# Altium PCB 990310_PCB.PcbDoc
Units mm, origin at the board's own origin, x right, y up, seen from the top; angles counter-clockwise.
Board outline 64.39 x 76.58 mm, 2 copper layers (Top Layer, Bottom Layer); 34 components, 39 nets, 141 pads, 0 vias.
Unrouted connection lines stored in the file: 84.
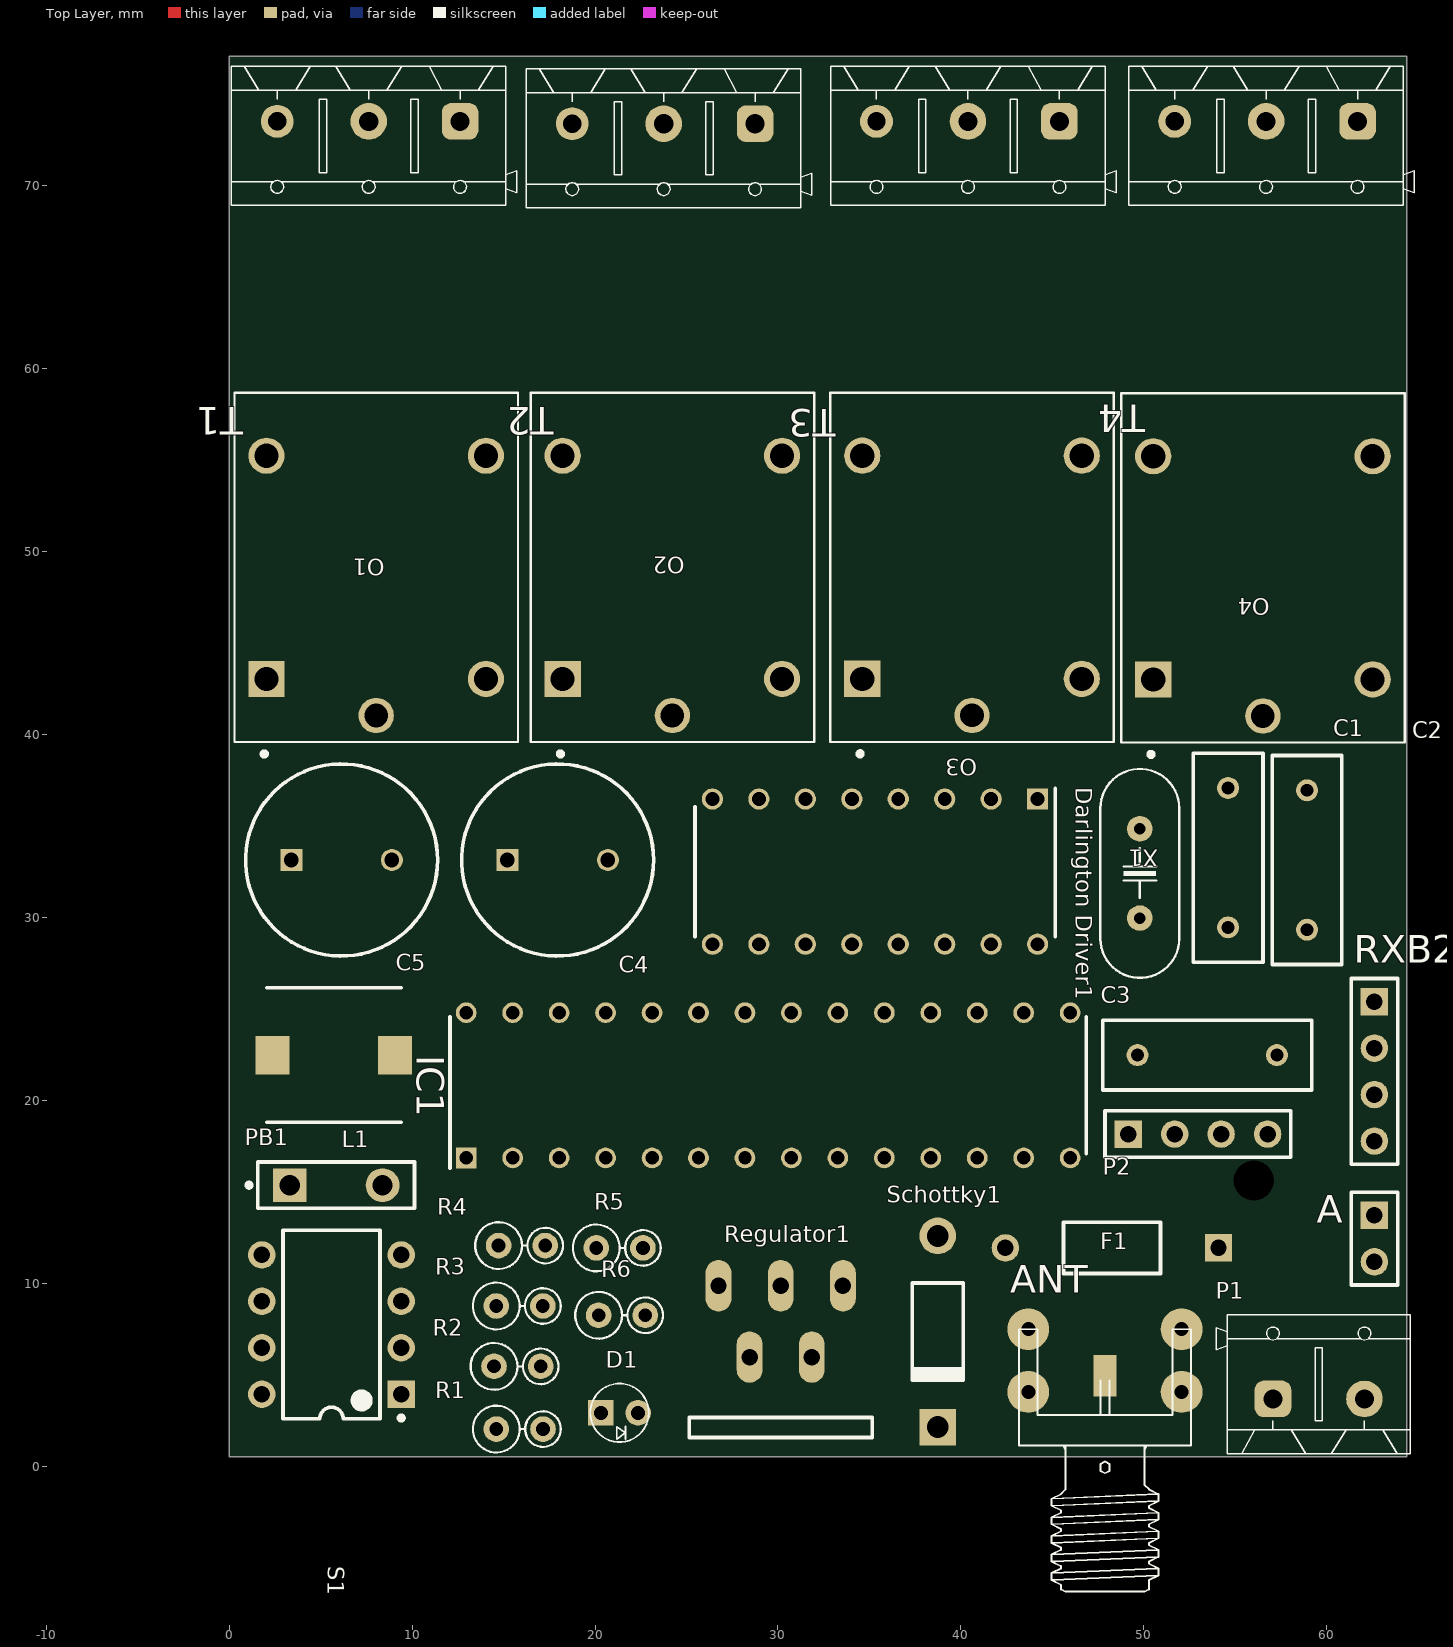
[diagram p0: Top Layer view]
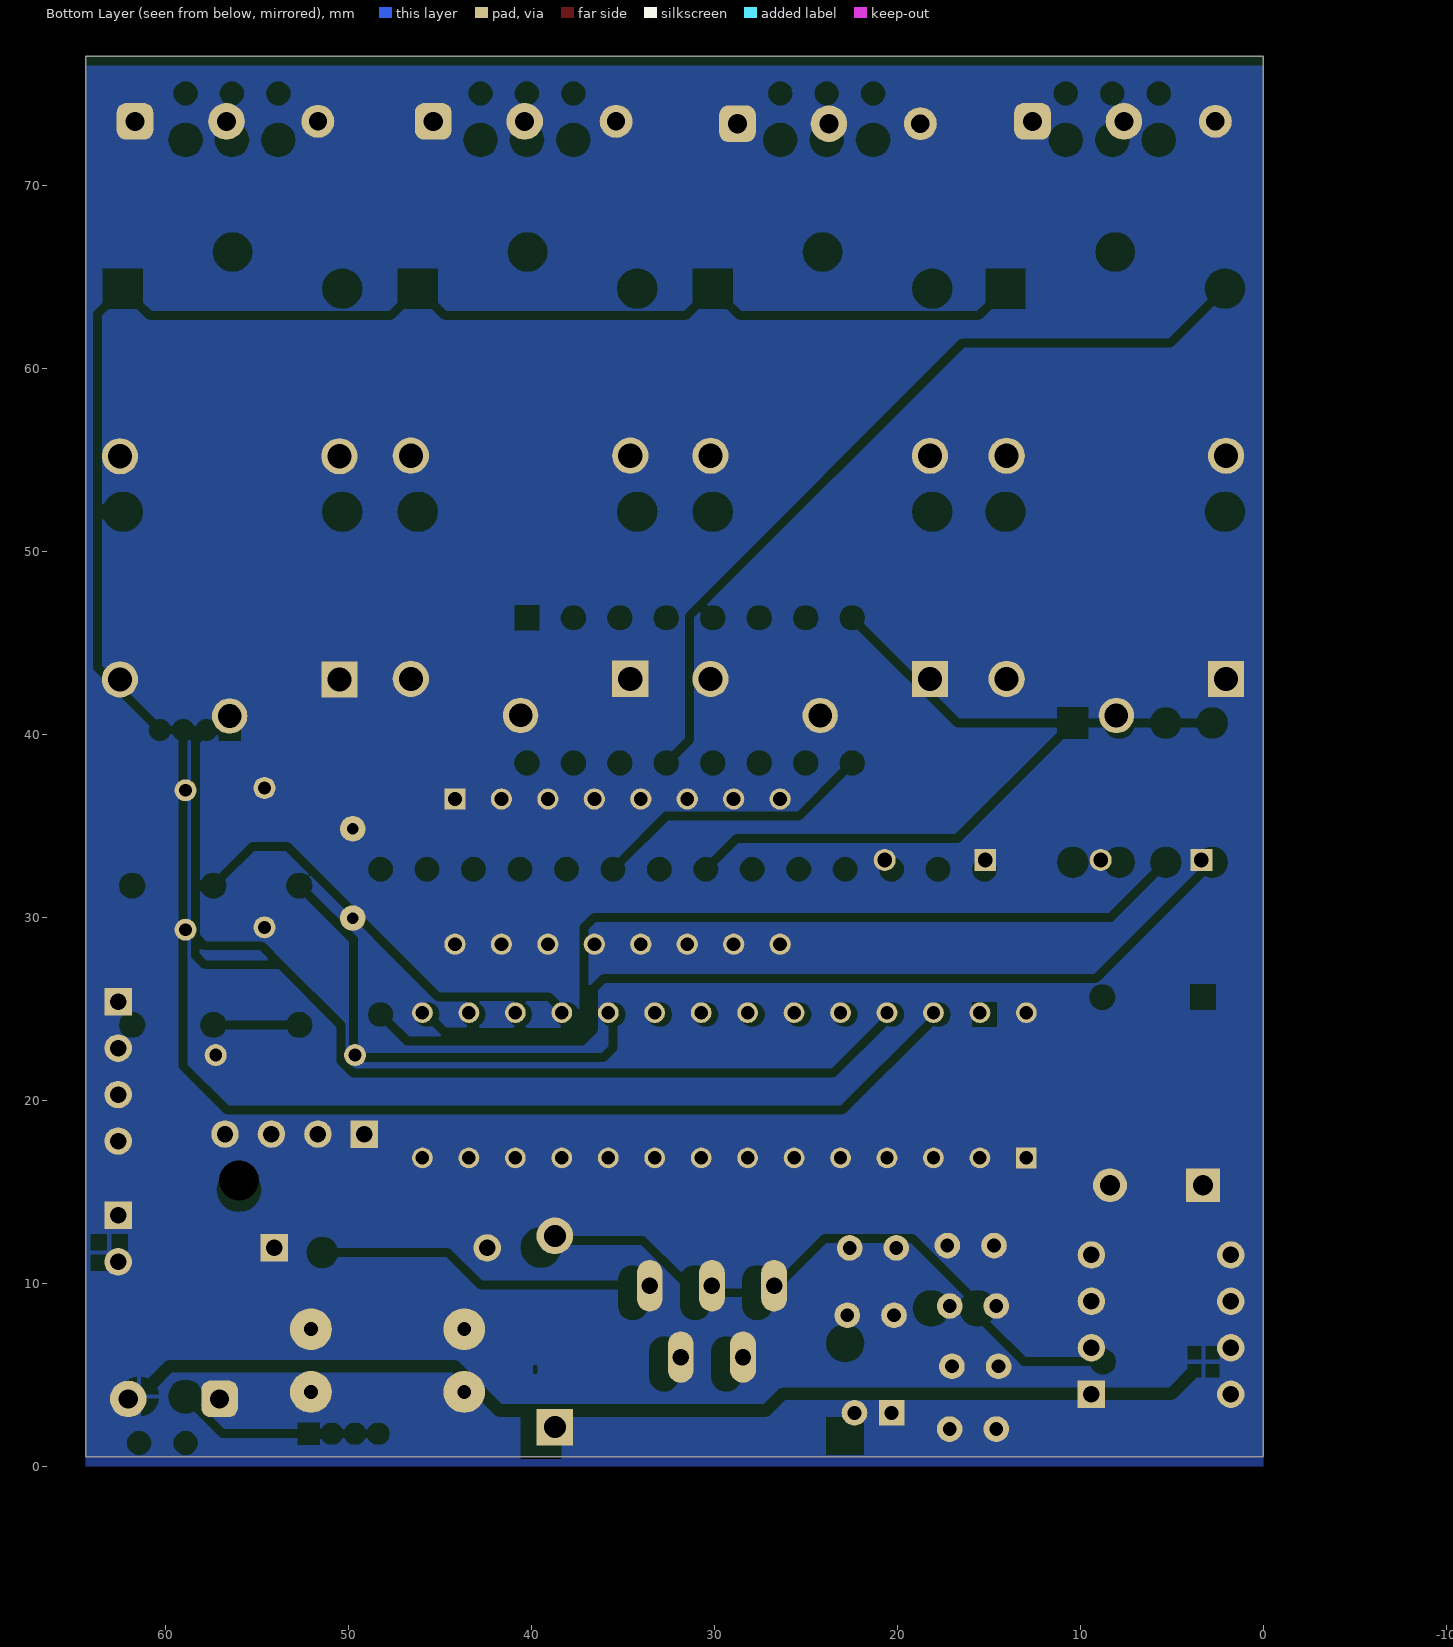
[diagram p1: Bottom Layer view, seen from below]

## Layer stack, top to bottom
Top Solder: solder mask 0.0102, Solder Resist, Dk 3.5
Top Layer: signal copper 0.0356
Dielectric 1: dielectric 0.32, FR-4, Dk 4.8
Bottom Layer: signal copper 0.0356
Bottom Solder: solder mask 0.0102, Solder Resist, Dk 3.5

## Board outline
0,0.508 64.389,0.508 64.389,77.089 0,77.089

## Design rules (kind name [scope] priority, off if disabled: settings)
Clearance [All] p1: gap=0.1 ignorepadtopadclearanceinfootprint=FALSE
PolygonConnect [All] p1: connectstyle=Relief reliefconductorwidth=0.254 reliefentries=4 polygonreliefangle="90 Angle" airgapwidth=0.254
RoomDefinition 990308_Schematic [InComponentClass('990308_Schematic')] p1: confinementstyle=ConfineIn formatcopy=TRUE lockcomponents=FALSE outline -25.4,-24.892 25.4,-24.892 25.4,0.508 -25.4,0.508
RoutingVias [All] p1: holewidth=0.711 width=1.27 viastyle="Through Hole" minholewidth=0.711 minwidth=1.27 maxholewidth=0.711 maxwidth=1.27
SolderMaskExpansion [All] p1: expansion=0.102 istentingtop=FALSE
Width [InNet('No Net')] p1: maxlimit=5 minlimit=0.5 preferedwidth=2
30 further rules are at their usual default settings.

## Components (designator, comment, footprint, x,y, rotation, side; value= is the part's Value field where it differs from the comment)
A "Header 2" "HDR 1X2" 62.611,13.716 r270 top
ANT "SMA-EL" SMA-ENDLAUNCH 47.879,4.953 r270 top
C1 "Cap" RAD-0.3 54.61,33.274 r90 top value=20pF
C2 "Cap" RAD-0.3 58.928,33.147 r90 top value=20pF
C3 "0.1uF" RAD-0.3 53.467,22.479 r180 top
C4 "100uF" CAPPRD550W60D1050H2150 15.201,33.147 r0 top
C5 "1000uF" CAPPRD550W60D1050H2150 3.39,33.147 r0 top
D1 "LED3MM" LED3mm_GRN 21.336,2.921 r0 top
"Darlington Driver1" "ULN2003A" DIP794W56P254L1918H533Q16N 35.306,32.512 r270 top
F1 "Fuse 1" PIN-W2/E2.8 48.26,11.938 r180 top
IC1 "ATMEGA8A-PU" DIP794W53P254L3467H457Q28N 29.464,20.828 r90 top
L1 "B82472P6152M000" INDPM7474X450N 5.715,22.479 r0 top
O1 "SRD-05VDC-SL-C" RELAY_SRD-05VDC-SL-C 8.032,49.149 r90 top
O2 "SRD-05VDC-SL-C" RELAY_SRD-05VDC-SL-C 24.226,49.149 r90 top
O3 "SRD-05VDC-SL-C" RELAY_SRD-05VDC-SL-C 40.609,49.153 r90 top
O4 "SRD-05VDC-SL-C" RELAY_SRD-05VDC-SL-C 56.515,49.121 r90 top
P1 "KF301_Terminal" "KF301 2PIN" 59.563,3.683 r0 top
P2 "Header 4" "HDR 1X4" 49.149,18.161 r0 top
PB1 "SW-PB" SPST-2 5.842,15.367 r0 top
R1 "1K" "Axial 0_25w_2_54mm" 15.875,2.032 r0 top
R2 "1K" "Axial 0_25w_2_54mm" 15.748,5.461 r0 top
R3 "1K" "Axial 0_25w_2_54mm" 15.87,8.763 r0 top
R4 "1K" "Axial 0_25w_2_54mm" 15.997,12.065 r0 top
R5 "1K" "Axial 0_25w_2_54mm" 21.341,11.938 r0 top
R6 "1K" "Axial 0_25w_2_54mm" 21.468,8.255 r0 top
Regulator1 "LM2576" TO220-5 30.148,1.469 r180 top
RXB22 "Header 4" "HDR 1X4" 62.611,25.4 r270 top
S1 "SW-DIP4" DIP-8 5.588,7.747 r180 top
Schottky1 "1N5822" DO-41 38.735,7.366 r270 top
T1 "KF301_Terminal" "KF301 3PIN" 7.62,73.533 r180 top
T2 "KF301_Terminal" "KF301 3PIN" 23.749,73.406 r180 top
T3 "KF301_Terminal" "KF301 3PIN" 40.386,73.533 r180 top
T4 "KF301_Terminal" "KF301 3PIN" 56.689,73.533 r180 top
X1 "16MHZ" "XTAL Small" 49.784,32.412 r90 top value=16MHz

## Footprints (in the part's own frame and the unit in brackets; to place one, negate y for a bottom-side part, rotate by r counter-clockwise, add the part's x,y. Pads: shape width x height; smd on the part's side, far side on the other; paste and mask are expansions set on the pad)
"Axial 0_25w_2_54mm" [mm] "Designer Abbas Basereh"
  round 1.4 hole 0.75: 1(1.275,0) 2(-1.275,0)
  silkscreen extent -2.55,-1.28 2.25,1.28, body extent -2.47,-1.2 1.57,1.2, height 9.4
CAPPRD550W60D1050H2150 [mm]
  rect 1.2x1.2 hole 0.8: 1(0,0)
  round 1.2 hole 0.8: 2(5.5,0)
  silkscreen extent -2.5,-5.25 8,5.25, body extent -2.5,-5.25 8,5.25, height 21.5
DIP794W53P254L3467H457Q28N [mm]
  rect 1.133x1.133 hole 0.733: 1(-3.969,16.51)
  round 1.133 hole 0.733: 2(-3.969,13.97) 3(-3.969,11.43) 4(-3.969,8.89) 5(-3.969,6.35) 6(-3.969,3.81) 7(-3.969,1.27) 8(-3.969,-1.27) 9(-3.969,-3.81) 10(-3.969,-6.35) 11(-3.969,-8.89) 12(-3.969,-11.43) 13(-3.969,-13.97) 14(-3.969,-16.51) 15(3.969,-16.51) 16(3.969,-13.97) 17(3.969,-11.43) 18(3.969,-8.89) 19(3.969,-6.35) 20(3.969,-3.81) 21(3.969,-1.27) 22(3.969,1.27) 23(3.969,3.81) 24(3.969,6.35) 25(3.969,8.89) 26(3.969,11.43) 27(3.969,13.97) 28(3.969,16.51)
  silkscreen extent -4.54,-17.4 3.75,17.4, body extent -4.1,-17.34 4.1,17.34, height 4.57
DIP794W56P254L1918H533Q16N [mm]
  rect 1.16x1.16 hole 0.76: 1(-3.97,8.89)
  round 1.16 hole 0.76: 2(-3.97,6.35) 3(-3.97,3.81) 4(-3.97,1.27) 5(-3.97,-1.27) 6(-3.97,-3.81) 7(-3.97,-6.35) 8(-3.97,-8.89) 9(3.97,-8.89) 10(3.97,-6.35) 11(3.97,-3.81) 12(3.97,-1.27) 13(3.97,1.27) 14(3.97,3.81) 15(3.97,6.35) 16(3.97,8.89)
  silkscreen extent -4.55,-9.84 3.55,9.84, body extent -4.11,-9.59 4.11,9.59, height 5.33
DIP-8 [mm] "DIP; 8 Leads; Row Spacing 7.62 mm; Pitch 2.54 mm"
  rect 1.5x1.5 hole 0.9: 1(-3.81,3.81)
  round 1.5 hole 0.9: 2(-3.81,1.27) 3(-3.81,-1.27) 4(-3.81,-3.81) 5(3.81,-3.81) 6(3.81,-1.27) 7(3.81,1.27) 8(3.81,3.81)
  silkscreen extent -3.94,-5.15 2.65,5.23, body extent -3.6,-5.15 3.6,5.15, height 5.08
DO-41 [mm] "Diode, Axial; Body 5.2 x 2.7 mm (LxDia. max), Lead Dia. 0.86 mm (max)"
  round 2 hole 1.2: 1(-5.23,0)
  rect 2x2 hole 1.2: 2(5.23,0)
  silkscreen extent -2.65,-1.4 2.75,1.4
"HDR 1X2" [mm] "Connector; Header; 2 Position"
  rect 1.5x1.5 hole 0.9: 1(0,0)
  round 1.5 hole 0.9: 2(2.54,0)
  silkscreen extent -1.27,-1.27 3.81,1.27, body extent -1.26,-1.27 3.81,1.26, height 8.51
"HDR 1X4" [mm] "Connector; Header; 4 Position"
  rect 1.5x1.5 hole 0.9: 1(0,0)
  round 1.5 hole 0.9: 2(2.54,0) 3(5.08,0) 4(7.62,0)
  silkscreen extent -1.27,-1.27 8.89,1.27, body extent -1.26,-1.27 8.89,1.26, height 8.51
INDPM7474X450N [mm]
  rect 1.85x2.1 smd: 1(-3.35,0) 2(3.35,0)
  silkscreen extent -3.67,-3.67 3.68,3.68, body extent -3.67,-3.67 3.67,3.67, height 4.5
"KF301 2PIN" [mm] "Designer Abbas Basereh"
  rrect50% 2x2 hole 1.05: 1(-2.5,0)
  round 2 hole 1.05: 2(2.5,0)
  silkscreen extent -5.6,-3 5,4.6, body extent -5.6,-3 5,4.6, height 10
"KF301 3PIN" [mm] "Designer Abbas Basereh"
  rrect50% 2x2 hole 1.05: 1(-5,0)
  round 2 hole 1.05: 2(0,0)
  round 1.8 hole 1: 3(5,0)
  silkscreen extent -8.1,-3 7.5,4.6, body extent -8.1,-3 7.5,4.6, height 10
LED3mm_GRN [mil]
  rect 55x55 hole 30: 1(-40,0)
  round 55 hole 30: 2(40,0)
  silkscreen extent -63,-63 63,63, body extent -69,-69 69,69, height 154
PIN-W2/E2.8 [mm] "Thru-Hole; 2 Leads"
  rect 1.5x1.5 hole 0.9: 1(-5.825,0)
  round 1.5 hole 0.9: 2(5.825,0)
  silkscreen extent -2.65,-1.4 2.65,1.4
RAD-0.3 [mm] "Radial Cap, Thru-Hole; 2 Leads; 0.3 in Pin Spacing"
  round 1.2 hole 0.7: 1(-3.81,0) 2(3.81,0)
  silkscreen extent -5.71,-1.91 5.71,1.91
RELAY_SRD-05VDC-SL-C [mm]
  rect 1.98x1.98 hole 1.32: A1(-6.1,6)
  round 1.98 hole 1.32: A2(-6.1,-6) NC(6.1,6) NO(6.1,-6)
  round 1.935 hole 1.29: COM(-8.1,0)
  silkscreen extent -10.3,-7.75 9.55,7.75
SMA-ENDLAUNCH [mil]
  rect 90x50 smd: 1(0,0)
  round 90 hole 30: 2(-100,165) 3(-100,-165) 4(35,-165) 5(35,165)
  silkscreen extent -100,-185 465,185, body extent -127,-120 470,130, height 140
SPST-2 [mm] "Switch; 2 Leads"
  rect 1.85x1.85 hole 1.1: 1(-2.54,0)
  round 1.85 hole 1.1: 2(2.54,0)
  silkscreen extent -4.89,-1.27 4.28,1.27
TO220-5 [mm]
  oval 1.408x2.816 hole 0.9: 1(-3.4,-8.4) 2(-1.7,-4.5) 3(0,-8.4) 4(1.7,-4.5) 5(3.4,-8.4)
  silkscreen extent -5,-1.2 5,-0.1
"XTAL Small" [mil]
  round 55 hole 25: 1(-96.06,0) 2(96.06,0)
  silkscreen extent -225,-85 225,85, body extent -226,-89 226,89, height 140

## Part data
A: "Header, 2-Pin"
ANT: "SMA THREADED RF CONNECTOR VERTICAL"
C1 C2: "Capacitor", LatestRevisionDate=17-Jul-2002, LatestRevisionNote="Re-released for DXP Platform.", PackageDescription="Radial Cap, Thru-Hole; 2 Leads; 0.3 in Pin Spacing", PackageReference=RAD-0.3, Published=8-Jun-2000, Publisher="Altium Limited"
C3: library part Cap, "Capacitor", LatestRevisionDate=17-Jul-2002, LatestRevisionNote="Re-released for DXP Platform.", PackageDescription="Radial Cap, Thru-Hole; 2 Leads; 0.3 in Pin Spacing", PackageReference=RAD-0.3, Published=8-Jun-2000, Publisher="Altium Limited"
C4 C5: library part 108CKE025M, "Capacitor Polarised", Manufacturer_Name=Cinch, Datasheet Link=https://componentsearchengine.com/Datasheets/2/108CKE025M.pdf, Height=21.5mm, Manufacturer_Part_Number=108CKE025M
D1: library part "LED 3MM", "Light Emitting Diode", Designer="Ali Hafizi"
"Darlington Driver1": "Integrated Circuit", Manufacturer_Name=STMicroelectronics, Mouser Part Number=511-ULN2003A, RS Part Number=6868209, Allied_Number=70014189, Allied Price/Stock=http://www.alliedelec.com/stmicroelectronics-uln2003a/70014189/, Datasheet Link=http://www.st.com/web/en/resource/technical/document/datasheet/CD00001244.pdf, Height=5.33mm, Manufacturer_Part_Number=ULN2003A, Mouser Price/Stock=https://www.mouser.com/Search/Refine.aspx?Keyword=511-ULN2003A, RS Price/Stock=http://uk.rs-online.com/web/p/products/6868209
F1: "Fuse", LatestRevisionDate=17-Jul-2002, LatestRevisionNote="Re-released for DXP Platform.", PackageDescription="Thru-Hole; 2 Leads", PackageReference=PIN-W2/E2.8, Published=8-Jun-2000, Publisher="Altium Limited"
IC1: "Integrated Circuit", Manufacturer_Name=Microchip, Mouser Part Number=556-ATMEGA8A-PU, RS Part Number=1310372P, Datasheet Link=http://www.atmel.com/images/atmel-8159-8-bit-avr-microcontroller-atmega8a_summary.pdf, Height=4.572mm, Manufacturer_Part_Number=ATMEGA8A-PU, Mouser Price/Stock=https://www.mouser.com/Search/Refine.aspx?Keyword=556-ATMEGA8A-PU, RS Price/Stock=http://uk.rs-online.com/web/p/products/1310372P
L1: "Inductor", Manufacturer_Name=EPCOS, Mouser Part Number=871-B82472P6152M000, Datasheet Link=https://www.tdk-electronics.tdk.com/inf/30/db/ind_2008/b82472p6.pdf, Height=4.5mm, Manufacturer_Part_Number=B82472P6152M000, Mouser Price/Stock=https://www.mouser.com/Search/Refine.aspx?Keyword=871-B82472P6152M000
O1 O2 O3 O4: "5V Trigger Relay Module For Arduino And Raspberry Pi 5V Trigger Relay Module For Arduino And Raspberry Pi", Package=None, Availability=Unavailable, MF="Songle Relay", MP=SRD-05VDC-SL-C, Price=None, SnapEDA_Link=https://www.snapeda.com/parts/SRD-05VDC-SL-C/Songle%20Relay/view-part/1029484/?ref=snap
P1: library part KF301-2Pin_Terminal, "Terminal 2 Pin 250VAC 16A", Designer="Abbas Basereh", Link=https://www.aliexpress.com/item/, Part. No="KF301 2P"
P2 RXB22: "Header, 4-Pin"
PB1: "Switch", LatestRevisionDate=17-Jul-2002, LatestRevisionNote="Re-released for DXP Platform.", PackageDescription="Switch; 2 Leads", PackageReference=SPST-2, Published=24-Mar-1999, Publisher="Altium Limited"
R1 R2 R3 R4 R5 R6: library part "RES Axial 0.25W", "RES Axial 0.25W", Data=4-1-2017, Desc.="RES Axial 0.25W", Designer="Abbas Basereh"
Regulator1: "Buck Switching Regulator IC Positive Fixed 5V 1 Output 3A TO-263-6, DÂ²Pak _5 Leads + Tab_, TO-263BA", Package="TO-263-6 National Semiconductor", Availability=Unavailable, MF="Texas Instruments", MP=LM2576, Price=None, SnapEDA_Link=https://www.snapeda.com/parts/LM2576/Texas%20Instruments/view-part/214937/?ref=snap
S1: "DIP Switch", LatestRevisionDate=17-Jul-2002, LatestRevisionNote="Re-released for DXP Platform.", PackageReference=DIP-8, Published=24-Mar-1999, Publisher="Altium Limited"
Schottky1: library part "Diode 1N4001", "1 Amp General Purpose Rectifier", Code_JEDEC=DO-204-AL, ComponentLink1Description="Manufacturer Link", ComponentLink1URL=http://www.fairchildsemi.com/, ComponentLink2Description=Datasheet, ComponentLink2URL=http://www.fairchildsemi.com/ds/1N%2F1N4001.pdf, DatasheetVersion=1998, LatestRevisionDate=17-Jul-2002, LatestRevisionNote="Re-released for DXP Platform.", PackageDescription="Diode, Axial; Body 5.2 x 2.7 mm (LxDia. max), Lead Dia. 0.86 mm (max)", PackageReference=DO-41, PackageVersion=Aug-1999, Published=8-Jun-2000, Publisher="Altium Limited"
T1 T2 T3 T4: library part KF301-3Pin_Terminal, "Terminal 3 Pin 250VAC 16A", Designer="Abbas Basereh", Link=https://www.aliexpress.com/item/, Part. No="KF301 3P"
X1: library part XTAL, "XTAL Crystal", Company=E.P.I.L, Design Date=11/04/2011

## Free pads (board coordinates)
  round 1.524 hole 2.2: 2(56.007,15.621)

## Nets (pads, with @x,y where several pads share a name; then routed paths per layer and width w, separated by ;. In a path a pad name is that pad's centre, name@x,y a point inside that pad or via, vN(x,y) a via of type N, cw(c..) or ccw(c..) an arc to the next point about the centre after c; other vN are vias at no path point)
5V: "Darlington Driver1.9" C3.1 C5.1 IC1.7 IC1.20 L1.2 O1.A1 O2.A1 O3.A1 O4.A1 P2.4 R1.2 R2.1 R3.1 R4.1 R5.2 R6.1 Regulator1.4 RXB22.4
24V: C4.1 F1.1 P1.2
DATA1: IC1.16 RXB22.3
DATA2: IC1.15 RXB22.2
GND: "Darlington Driver1.8" A.2 C1.1 C2.1 C3.2 C4.2 C5.2 D1.2 IC1.8 IC1.22 P1.1 P2.1 PB1.1 Regulator1.3 Regulator1.5 RXB22.1 S1.1 S1.2 S1.3 S1.4 Schottky1.1
NetA_1: A.1 ANT.1
NetANT_2: ANT.2 ANT.3 ANT.4 ANT.5
NetC1_2: C1.2 IC1.9 X1.1
NetC2_2: C2.2 IC1.10 X1.2
NetD1_1: D1.1 R6.2
"NetDarlington Driver1_13": "Darlington Driver1.13" O1.A2
"NetDarlington Driver1_14": "Darlington Driver1.14" O2.A2
"NetDarlington Driver1_15": "Darlington Driver1.15" O3.A2
"NetDarlington Driver1_16": "Darlington Driver1.16" O4.A2
NetF1_2: F1.2 Regulator1.1
NetL1_1: L1.1 Regulator1.2 Schottky1.2
NetO1_COM: O1.COM T1.2
NetO1_NC: O1.NC T1.3
NetO1_NO: O1.NO T1.1
NetO2_COM: O2.COM T2.2
NetO2_NC: O2.NC T2.3
NetO2_NO: O2.NO T2.1
NetO3_COM: O3.COM T3.2
NetO3_NC: O3.NC T3.3
NetO3_NO: O3.NO T3.1
NetO4_COM: O4.COM T4.2
NetO4_NC: O4.NC T4.3
NetO4_NO: O4.NO T4.1
PB0: IC1.14 R4.2 S1.5
PD5: IC1.11 R1.1 S1.8
PD6: IC1.12 R2.2 S1.7
PD7: IC1.13 R3.2 S1.6
RL1: "Darlington Driver1.1" IC1.23
RL2: "Darlington Driver1.2" IC1.24
RL3: "Darlington Driver1.3" IC1.25
RL4: "Darlington Driver1.4" IC1.26
RST: IC1.1 PB1.2 R5.1
RX: IC1.3 P2.2
TX: IC1.2 P2.3
pads on no net: "Darlington Driver1.5" "Darlington Driver1.6" "Darlington Driver1.7" "Darlington Driver1.10" "Darlington Driver1.11" "Darlington Driver1.12" IC1.4 IC1.5 IC1.6 IC1.17 IC1.18 IC1.19 IC1.21 IC1.27 IC1.28

## Polygon pours and split planes (outlines as drawn)
24V on Bottom Layer "24V_L02_P000" (solid, pour order 0): 0,76.581 64.389,76.581 64.389,0 0,0

## Other copper
Top Layer:
  pour cut-out: -8.255,28.194
  pour cut-out: 0.367,76.581

## Silkscreen, mask and mechanical layers (free items; w line width, h text height)
Top Overlay:
  text "www.ARIONIC.ir" at 121.666,36.83 h1.52